# EAGLE board 524_kaya (EAGLE 9.5.1)
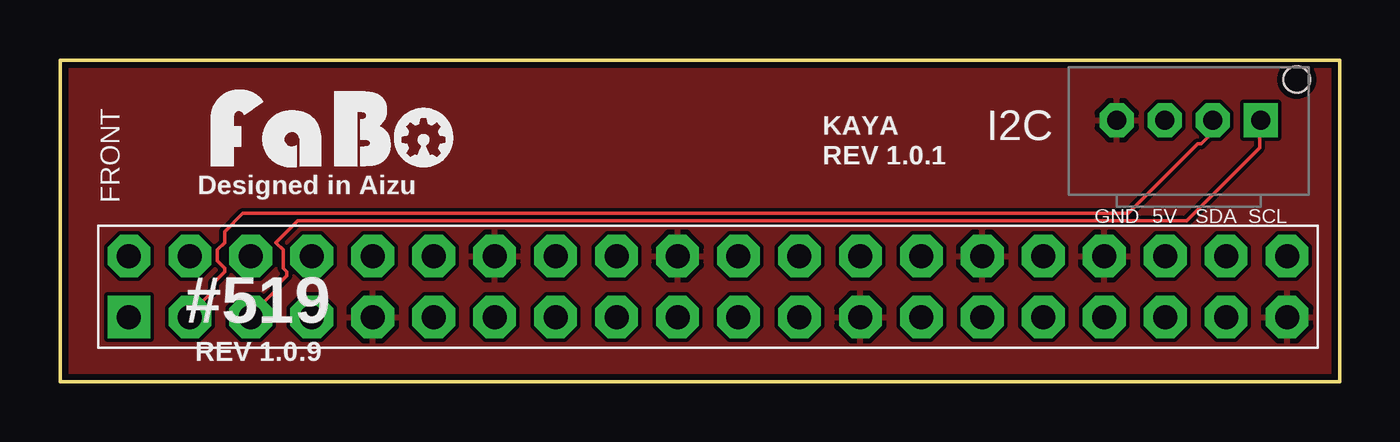
[diagram p0: board, top side]
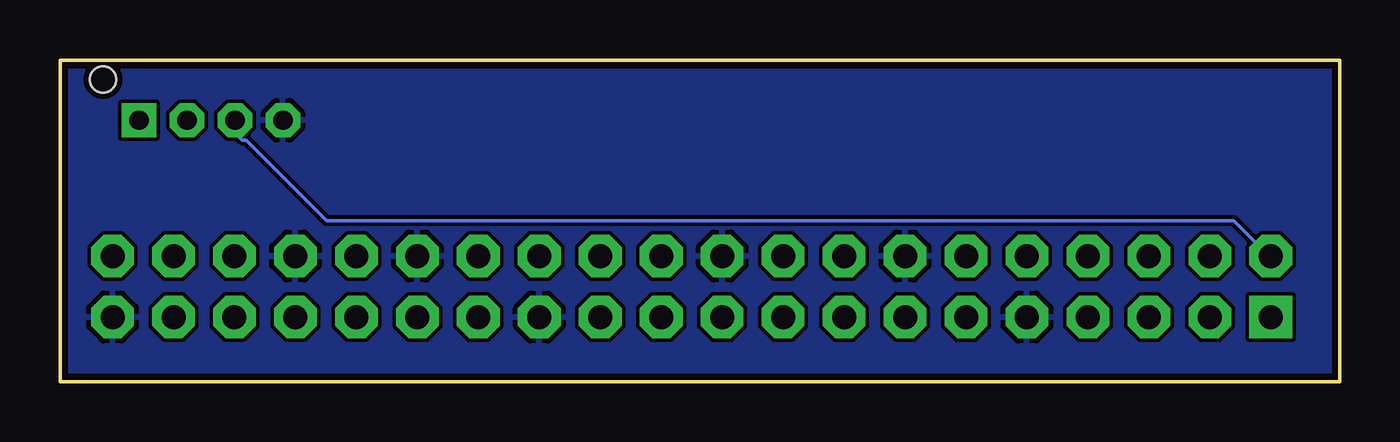
[diagram p1: board, bottom side, seen from below]

Size 53.32 x 13.4 mm. Coordinates in mm from the lower left corner, seen from the top.
Outline: 0,0 53.32,0 53.32,13.4 0,13.4 0,0
Copper layers (1*16): Top 0.035mm / dielectric 1.6mm / Bottom 0.035mm
Design rules "PCBway": minimum track width 6mil, minimum drill 12mil, track to track 6mil, track to pad 6mil, pad to pad 6mil, via to via 6mil, smd to smd 6mil, copper to edge 10mil, drill to drill 10mil, minimum pad ring 10mil, minimum via ring 6mil, stop-mask expansion 2mil, vias tented up to drill 100mil, thermal gap 8mil

## Footprints (pad centres in the part's own frame; a part is rotated, then mirrored left to right if it is on the bottom)
FABO_BRICK_I2C_B04B-PASK-1 = drill 0.8 pad 1.422 octagon: GND -3,0; SDA 1,0; VCC -1,0 | drill 0.8 pad 1.422 square: SCL 3,0 | hole 1.1: 4.5,1.7
JETSON_NANO_NOBOARDER = drill 1 pad 1.778 square: 1 1.27,1.27 | drill 1 pad 1.778 octagon: 2 1.27,3.81; 3 3.81,1.27; 4 3.81,3.81; 5 6.35,1.27; 6 6.35,3.81; 7 8.89,1.27; 8 8.89,3.81; 9 11.43,1.27; 10 11.43,3.81; 11 13.97,1.27; 12 13.97,3.81; 13 16.51,1.27; 14 16.51,3.81; 15 19.05,1.27; 16 19.05,3.81; 17 21.59,1.27; 18 21.59,3.81; 19 24.13,1.27; 20 24.13,3.81; 21 26.67,1.27; 22 26.67,3.81; 23 29.21,1.27; 24 29.21,3.81; 25 31.75,1.27; 26 31.75,3.81; 27 34.29,1.27; 28 34.29,3.81; 29 36.83,1.27; 30 36.83,3.81; 31 39.37,1.27; 32 39.37,3.81; 33 41.91,1.27; 34 41.91,3.81; 35 44.45,1.27; 36 44.45,3.81; 37 46.99,1.27; 38 46.99,3.81; 39 49.53,1.27; 40 49.53,3.81

## Placement (x,y rotation side)
I2C  [FABO_BRICK_I2C_B04B-PASK-1]  47.03,10.89 0 top
U$2  JETSON_NANO_NOBORDER  [JETSON_NANO_NOBOARDER]  1.6,1.42 0 top
U$14  [LOGO_FABO_MS]  11.34,8.55 0 top

## Library data of the parts
I2C = FaBo-Template
U$2 = FaBo-Boards
U$14 = FaBo-etc

## Nets
3V3: U$2.1
5V: I2C.VCC U$2.2
CE0: U$2.24
GND: I2C.GND U$2.9 U$2.14 U$2.20 U$2.25 U$2.30 U$2.34 U$2.39
GPIO4: U$2.7
GPIO5: U$2.29
GPIO6: U$2.31
GPIO12: U$2.32
GPIO13: U$2.33
GPIO16: U$2.36
GPIO17: U$2.11
GPIO18: U$2.12
GPIO19: U$2.35
GPIO20: U$2.38
GPIO21: U$2.40
GPIO22: U$2.15
GPIO23: U$2.16
GPIO24: U$2.18
GPIO25: U$2.22
GPIO26: U$2.37
GPIO27: U$2.13
MISO: U$2.21
MOSI: U$2.19
NC1: U$2.4
NC2: U$2.6
RX: U$2.10
SCL: I2C.SCL U$2.5
SCLK: U$2.23
SDA: I2C.SDA U$2.3
TX: U$2.8

## Tracks (layer width: path | path; a pad name or v marks a point on that pad's centre or on a via)
5V
  Bottom 0.152: I2C.VCC 46.01,10.35 45.72,10.06 45.57,10.06 42.22,6.71 4.42,6.71 2.9,5.18 U$2.2
GND
  pour Top: 0,0 53.32,0 53.32,12.4 53.32,13.64 52.08,13.64 0,13.64
  pour Bottom: 0,0 53.32,0 53.32,13.64 0,13.64
SCL
  Top 0.152: I2C.SCL 49.99,10.76 49.99,9.75 46.94,6.71 9.91,6.71 8.99,5.79 9.3,5.49 9.3,4.72 9.45,4.57 9.45,4.42 8.99,3.96 8.99,3.81 7.92,2.74 U$2.5
SDA
  Top 0.152: I2C.SDA 47.91,10.27 47.55,9.91 47.4,9.91 44.5,7.01 7.62,7.01 6.86,6.25 6.86,5.79 6.55,5.49 6.55,5.03 6.86,4.72 6.86,4.57 6.4,4.12 6.4,3.81 5.33,2.74 U$2.3

## Text on the board
tPlace: KAYA | REV 1.0.1 | Designed in Aizu | FRONT | GND | 5V | SDA | SCL | #519 | REV 1.0.9